# EAGLE board main (EAGLE 8.4.0)
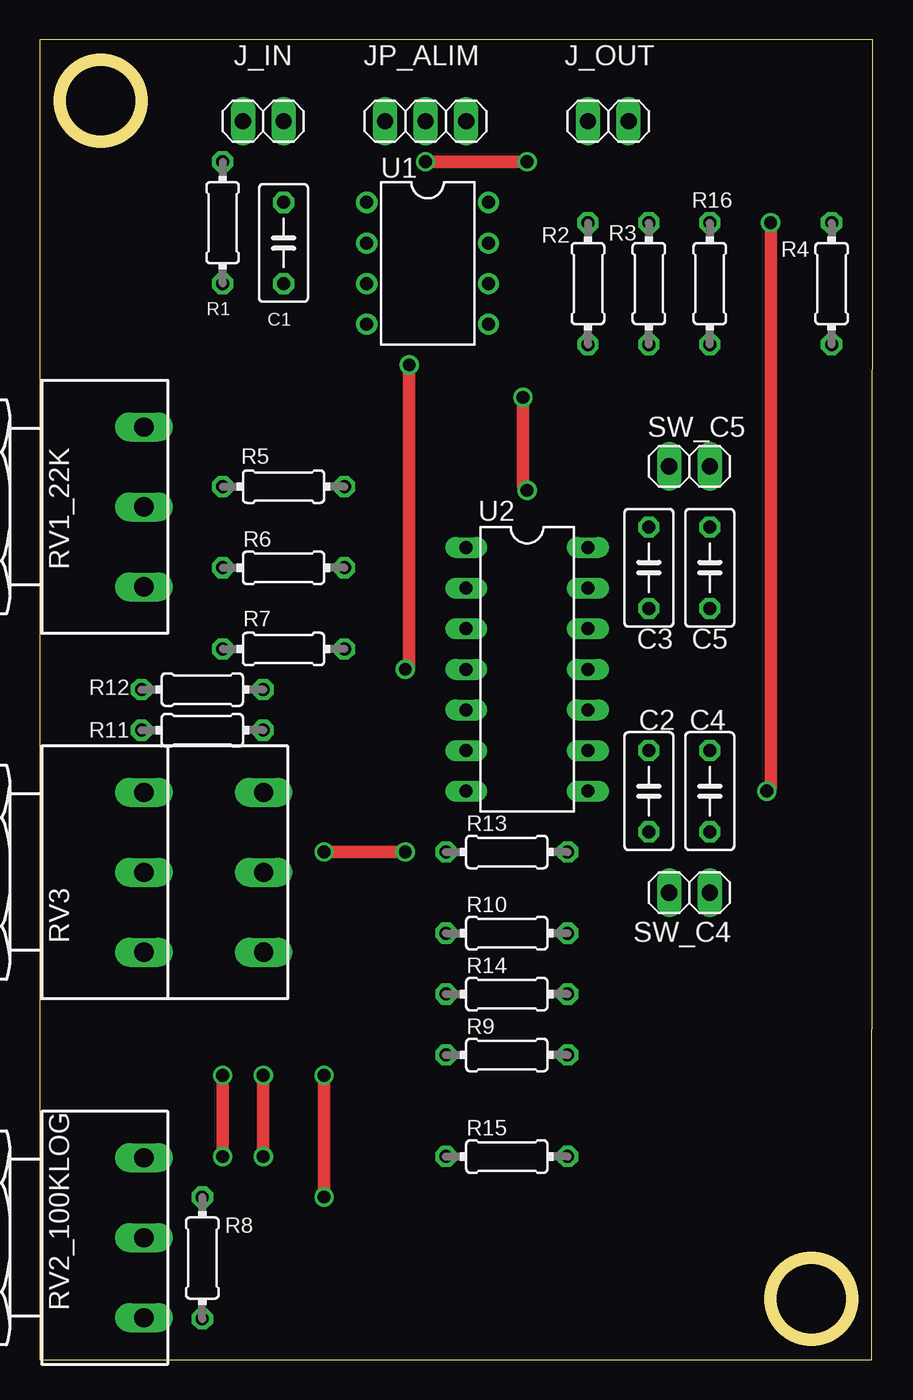
[diagram p0: board, top side]
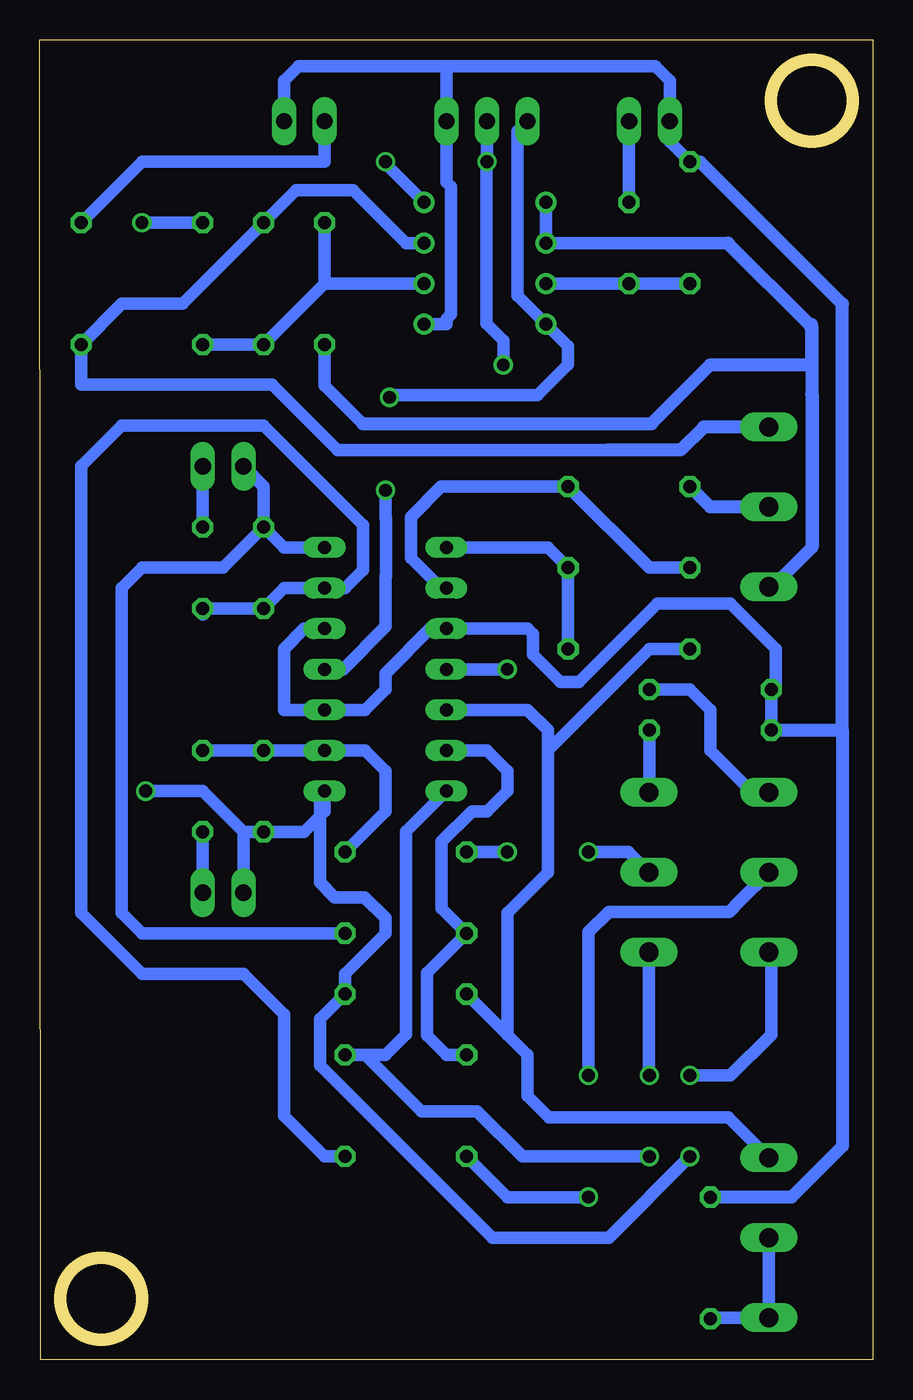
[diagram p1: board, bottom side, seen from below]

Size 52.1 x 82.55 mm. Coordinates in mm from the lower left corner, seen from the top.
Outline: 0,0 52.05,0 52.1,82.55 0,82.55 0,0
Outline: circle at 48.26,3.81 radius 2.54
Outline: circle at 3.81,78.74 radius 2.54
Copper layers (1*16): Top 0.035mm / dielectric 1.5mm / Bottom 0.035mm
Design rules "default": minimum track width 6mil, minimum drill 0.35mm, track to track 6mil, track to pad 6mil, pad to pad 6mil, via to via 6mil, smd to smd 6mil, copper to edge 40mil, drill to drill 6mil, minimum pad ring 10mil, minimum via ring 8mil, stop-mask expansion 4mil, vias tented up to drill 0mil, thermal gap 10mil
Net classes: 0 default: width 0.787 mm, clearance 0.508 mm

## Footprints (pad centres in the part's own frame; a part is rotated, then mirrored left to right if it is on the bottom)
C050-030X075 = drill 0.813 octagon: 1 -2.54,0; 2 2.54,0
1X02 = drill 1.016 long: 1 -1.27,0; 2 1.27,0
1X03 = drill 1.016 long: 1 -2.54,0; 2 0,0; 3 2.54,0
0204/7 = drill 0.813 octagon: 1 -3.81,0; 2 3.81,0
PC16S = drill 1.2 long: 1A -5,6.5; 1E 5,6.5; 1S 0,6.5
PC16D = drill 1.2 long: 1A -5,6.5; 1E 5,6.5; 1S 0,6.5; 2A -5,14; 2E 5,14; 2S 0,14
DIL08 = drill 0.813 pad 1.27: 1 -3.81,-3.81; 2 -1.27,-3.81; 3 1.27,-3.81; 4 3.81,-3.81; 5 3.81,3.81; 6 1.27,3.81; 7 -1.27,3.81; 8 -3.81,3.81
DIL14 = drill 0.813 long: 1 -7.62,-3.81; 2 -5.08,-3.81; 3 -2.54,-3.81; 4 0,-3.81; 5 2.54,-3.81; 6 5.08,-3.81; 7 7.62,-3.81; 8 7.62,3.81; 9 5.08,3.81; 10 2.54,3.81; 11 0,3.81; 12 -2.54,3.81; 13 -5.08,3.81; 14 -7.62,3.81

## Placement (x,y rotation side)
C1  220n  [C050-030X075]  15.24,69.85 270 top
C2  1n  [C050-030X075]  38.1,35.56 270 top
C3  1n  [C050-030X075]  38.1,49.53 90 top
C4  10n  [C050-030X075]  41.91,35.56 270 top
C5  10n  [C050-030X075]  41.91,49.53 90 top
J_IN  gnd entrée  [1X02]  13.97,77.47 0 top
J_OUT  sortie gnd  [1X02]  35.56,77.47 0 top
JP_ALIM  -12 +12 gnd  [1X03]  24.13,77.47 0 top
R1  100k  [0204/7]  11.43,71.12 270 top
R2  100k  [0204/7]  34.29,67.31 90 top
R3  100k  [0204/7]  38.1,67.31 90 top
R4  100  [0204/7]  49.53,67.31 90 top
R5  51k  [0204/7]  15.24,54.61 180 top
R6  100k  [0204/7]  15.24,49.53 0 top
R7  100k  [0204/7]  15.24,44.45 180 top
R8  2k2  [0204/7]  10.16,6.35 270 top
R9  100k  [0204/7]  29.21,19.05 0 top
R10  100k  [0204/7]  29.21,26.67 0 top
R11  3k9  [0204/7]  10.16,39.37 0 top
R12  3k9  [0204/7]  10.16,41.91 0 top
R13  10k  [0204/7]  29.21,31.75 0 top
R14  51k  [0204/7]  29.21,22.86 0 top
R15  10k  [0204/7]  29.21,12.7 0 top
R16  11K  [0204/7]  41.91,67.31 270 top
RV1_22K  PC16S  [PC16S]  0,53.34 270 top
RV2_100KLOG  PC16S  [PC16S]  0,7.62 270 top
RV3  100k  [PC16D]  0,30.48 270 top
SW_C4  [1X02]  40.64,29.21 180 top
SW_C5  [1X02]  40.64,55.88 0 top
U1  TL082P  [DIL08]  24.26,68.58 270 top
U2  TL084P  [DIL14]  30.48,43.18 270 top

## Library data of the parts
C1-C5 = rcl; SPICEPREFIX: C
J_IN J_OUT JP_ALIM SW_C4 SW_C5 = pinhead
R1-R16 = rcl; SPICEPREFIX: R
RV1_22K RV2_100KLOG = piher; OC_FARNELL: 4452940; OC_NEWARK: unknown
RV3 = piher; OC_FARNELL: 4453049; OC_NEWARK: unknown
U1 = linear; DATA_SHEET: <a href="http://www.ti.com/lit/ds/symlink/tl084a.pdf"> Data sheet </a>
U2 = linear

## Nets
+12V: JP_ALIM.2 U1.8 U2.4
-12V: JP_ALIM.1 U1.4 U2.11
GND: J_IN.1 J_OUT.2 JP_ALIM.3 R1.1 R8.1 R11.1 R12.1 U1.5 U2.3 U2.10 U2.12
N$1: C1.2 R1.2 U1.3
N$2: R2.1 RV1_22K.1E U1.1 U1.2
N$3: R3.2 R4.1 RV1_22K.1A U1.7
N$4: R2.2 R3.1 R16.2 U1.6
N$5: C2.2 R14.2 R16.1 RV3.1E SW_C4.2 U2.8
N$6: C1.1 J_IN.2
N$7: J_OUT.1 R4.2
N$8: R5.2 RV1_22K.1S
N$9: R5.1 R6.1 U2.2
N$10: R6.2 R7.1 U2.1
N$11: R9.1 R10.1 U2.6
N$12: R7.2 R14.1 RV2_100KLOG.1A U2.5
N$13: R8.2 RV2_100KLOG.1E RV2_100KLOG.1S
N$14: R9.2 RV3.2E U2.7
N$15: R11.2 RV3.2A
N$16: R12.2 RV3.1A
N$18: R13.1 RV3.2S
N$19: R15.1 RV3.1S
N$20: C3.2 R10.2 SW_C5.1 U2.14
N$21: C2.1 C4.1 R13.2 U2.9
N$22: C3.1 C5.1 R15.2 U2.13
N$23: C4.2 SW_C4.1
N$24: C5.2 SW_C5.2

## Tracks (layer width: path | path; a pad name or v marks a point on that pad's centre or on a via)
+12V  (via drill 0.8)
  Top 0.787: v24.13,74.93 v30.48,74.93 | v23.11,62.23 23.11,43.18 v22.86,43.18
  Bottom 0.787: U1.8 30.48,74.8 v30.48,74.93 | JP_ALIM.2 v24.13,74.93 24.16,74.91 24.16,64.8 23.11,63.75 v23.11,62.23 | v22.86,43.18 U2.4
-12V  (via drill 0.8)
  Top 0.787: v30.23,60.2 30.23,54.63 v30.48,54.37
  Bottom 0.787: JP_ALIM.1 22.22,76.84 22.22,66.55 U1.4 19.06,63.39 19.06,62.23 20.97,60.32 30.1,60.32 v30.23,60.2 | v30.48,54.37 30.48,52.63 30.45,52.61 30.45,48.99 30.48,48.97 30.48,45.85 33.15,43.18 U2.11
GND
  Bottom 0.787: U1.5 26.67,64.77 26.67,65.1 26.38,65.39 26.38,73.37 26.67,73.66 JP_ALIM.3 26.67,80.91 | J_OUT.2 36.83,80.01 35.93,80.91 26.67,80.91 | 26.67,80.91 13.6,80.91 12.7,80.01 J_IN.1 12.7,76.2 R1.1 | U2.12 35.56,45.72 36.83,44.45 36.83,40.64 U2.10 31.75,40.64 30.48,41.91 30.48,42.93 27.69,45.72 U2.3 21.59,45.72 21.25,45.38 21.25,44.11 19.52,42.38 18.38,42.38 13.48,47.28 8.89,47.28 6.06,44.45 6.06,42.2 R12.1 R11.1
  Bottom 0.813: R1.1 10.79,74.93 1.89,66.03 1.89,39.37 | 1.89,39.37 1.89,13.35 5.08,10.16 R8.1 | R11.1 1.89,39.37
N$1
  Bottom 0.787: U1.3 C1.2 R1.2
N$2
  Bottom 0.787: U1.1 U1.2 9.05,69.85 | R2.1 34.29,60.93 31.9,58.55
  Bottom 0.813: 3.81,62.23 3.81,64.77 3.98,64.77 | 3.81,62.23 3.81,60.39 3.79,60.36 3.79,50.82 | 31.9,58.55 13.84,58.55 10.16,62.23 3.81,62.23 | RV1_22K.1E 6.27,48.34 3.79,50.82 | 3.98,64.77 9.05,69.85 | 3.79,50.82 3.79,64.58 3.98,64.77
N$3
  Bottom 0.787: U1.7 29.21,69.85 32.51,73.15 36.07,73.15 R3.2 43.18,66.04 46.99,66.04 R4.1 49.53,60.98 37.56,60.98 33.47,56.9 16.59,56.9
  Bottom 0.813: 16.59,56.9 12.01,56.9 10.57,58.34 RV1_22K.1A
N$4
  Bottom 0.787: U1.6 34.29,67.31 | R2.2 34.29,67.31 | 34.29,67.31 R3.1 R16.2
N$5  (via drill 0.8)
  Top 0.787: v45.49,35.56 45.72,35.79 v45.72,71.12 | v11.43,17.78 v11.43,12.7
  Bottom 0.787: RV3.1E 6.35,25.33 6.35,20.32 8.89,17.78 v11.43,17.78 | 39.37,33.02 C2.2 35.56,33.02 34.29,34.29 U2.8 34.58,35.27 34.58,29.83 33.67,28.92 31.79,28.92 30.49,27.61 30.49,26.67 33.02,24.14 R14.2 34.58,21.3 34.58,18.4 23.8,7.62 16.51,7.62 v11.43,12.7 | R16.1 v45.72,71.12 | 39.37,33.02 SW_C4.2 | 39.37,33.02 41.91,35.56 v45.49,35.56 45.7,35.56
N$6
  Bottom 0.787: J_IN.2 C1.1
N$7
  Bottom 0.787: J_OUT.1 34.29,74.93 45.72,74.93 R4.2
N$8
  Bottom 0.813: RV1_22K.1S 10.16,53.34 R5.2
N$9
  Bottom 0.787: R6.1 13.97,49.53 R5.1 27,54.61 28.89,52.72 28.89,50.15 27,48.26 U2.2
N$10
  Bottom 0.787: R7.1 R6.2 20.32,50.8 U2.1
N$11
  Bottom 0.787: R9.1 26.67,19.05 27.89,20.27 27.89,24.17 R10.1 26.96,28.23 26.96,32.4 25.07,34.29 24.13,34.29 22.86,35.56 22.86,36.83 24.13,38.1 U2.6
N$12
  Bottom 0.787: R7.2 13.97,44.45 20.32,38.1 | U2.5 21.59,40.64 20.32,39.37 20.32,38.1 | R14.1 22.86,20.32 | 22.86,20.32 21.59,19.05 21.59,16.51 20.24,15.16 9.04,15.16 RV2_100KLOG.1A | 20.32,38.1 20.32,30.48 22.86,27.94 22.86,20.32
N$13
  Bottom 0.787: RV2_100KLOG.1S RV2_100KLOG.1E 10.08,2.62 R8.2
N$14  (via drill 0.8)
  Top 0.787: v13.97,17.78 v13.97,12.7
  Bottom 0.787: U2.7 29.19,33.04 29.19,20.34 30.48,19.05 R9.2 31.75,19.05 28.23,15.53 24.75,15.53 21.92,12.7 v13.97,12.7 | RV3.2E 14,17.81 v13.97,17.78
N$15
  Bottom 0.787: RV3.2A 13.97,35.51 R11.2
N$16
  Bottom 0.787: 6.5,35.71 RV3.1A 7.54,35.48 10.16,38.1 10.16,40.64 11.43,41.91 R12.2
N$18  (via drill 0.8)
  Top 0.787: v17.78,31.75 v22.86,31.75
  Bottom 0.787: RV3.2S 15.27,31.75 v17.78,31.75 | v22.86,31.75 R13.1
N$19  (via drill 0.8)
  Top 0.787: v17.78,10.16 v17.78,17.78
  Bottom 0.787: RV3.1S 8.33,28.65 8.96,28.02 10.16,28.02 16.51,28.02 17.78,26.74 v17.78,17.78 | R15.1 22.86,10.16 v17.78,10.16
N$20
  Bottom 0.787: U2.14 36.83,50.8 C3.2 | R10.2 45.72,26.67 46.99,27.94 46.99,35.02 | C3.2 38.1,54.61 SW_C5.1 | C3.2 40.64,49.53 45.72,49.53 46.99,48.26 46.99,35.02 | 47,35.03 46.99,35.02
N$21
  Bottom 0.787: C4.1 | C4.1 C2.1 U2.9 31.75,38.1 30.48,36.83 30.48,34.29 R13.2
N$22
  Bottom 0.787: R15.2 34.29,12.7 36.83,15.24 36.83,21.59 39.37,24.13 45.72,24.13 49.53,27.94 49.53,55.88 46.99,58.42 38.1,58.42 31.88,52.2 31.88,49.4 33.02,48.26 U2.13 36.83,48.26 C3.1 C5.1 41.91,46.6
N$23
  Bottom 0.787: C4.2 SW_C4.1
N$24
  Bottom 0.787: SW_C5.2 C5.2